# EAGLE board untitled (EAGLE 7.2.0)
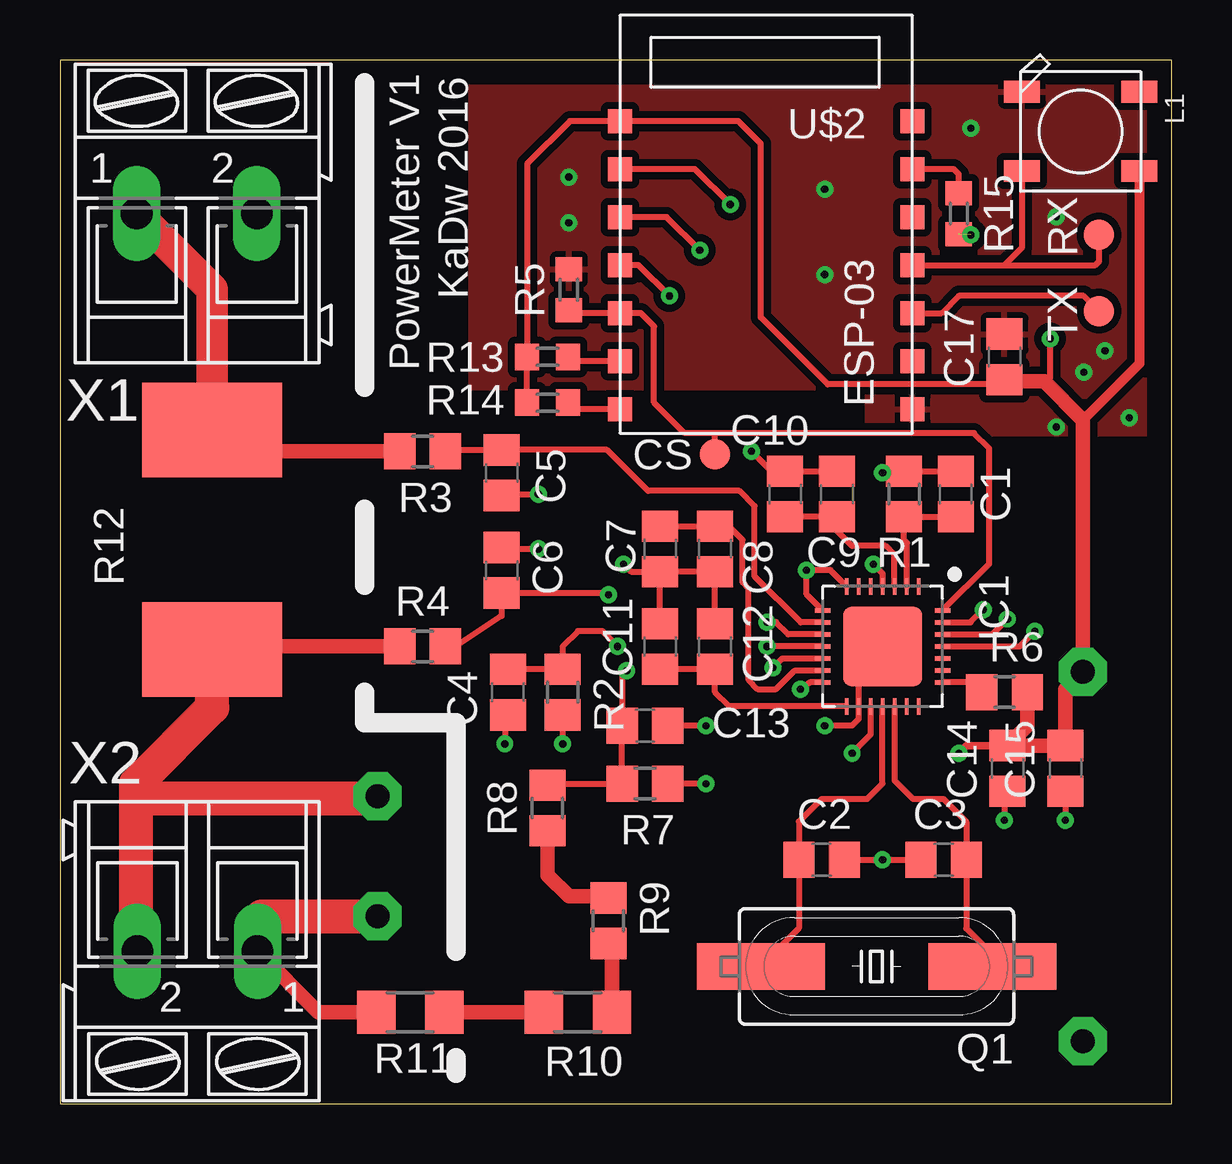
[diagram p0: board, top side]
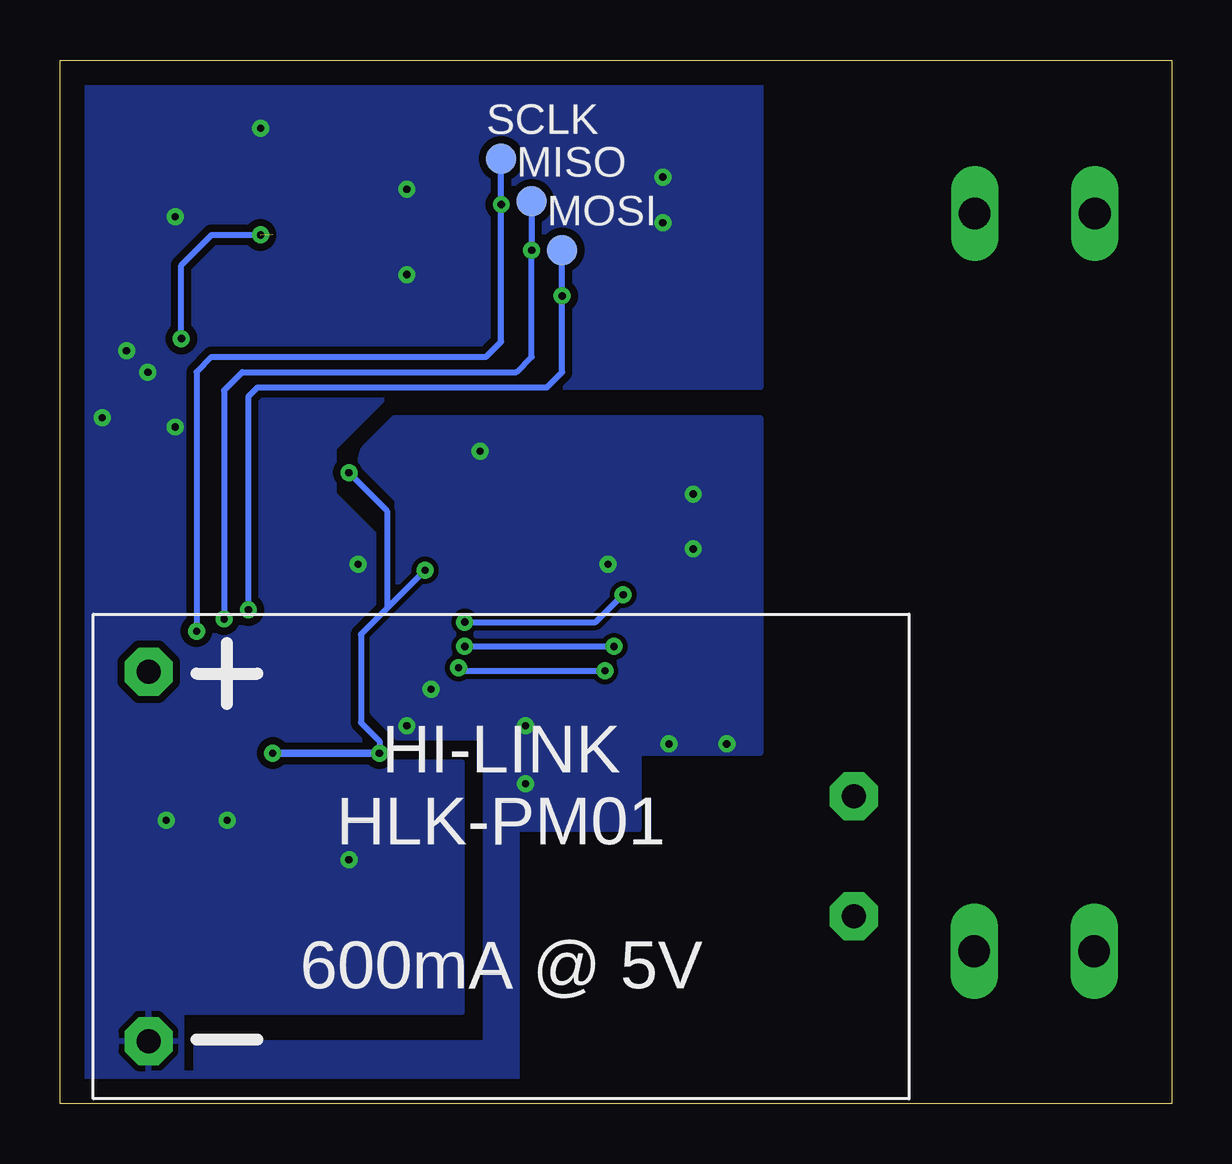
[diagram p1: board, bottom side, seen from below]

Size 46.33 x 43.48 mm. Coordinates in mm from the lower left corner, seen from the top.
Outline: 0,0 46.33,0 46.33,43.48 0,43.48 0,0
Copper layers (1*16): Top 0.035mm / dielectric 1.5mm / Bottom 0.035mm
Design rules "default": minimum track width 10mil, minimum drill 24mil, track to track 8mil, track to pad 8mil, pad to pad 8mil, via to via 8mil, smd to smd 8mil, copper to edge 40mil, drill to drill 8mil, minimum pad ring 10mil, minimum via ring 8mil, stop-mask expansion 4mil, vias tented up to drill 0mil, thermal gap 10mil

## Footprints (pad centres in the part's own frame; a part is rotated, then mirrored left to right if it is on the bottom)
C0805 = smd 1.3 x 1.5: 1 -0.95,0; 2 0.95,0
B1,27 = smd 1.27 x 1.27: TP 0,0
QFN28-ML = smd 0.7 x 0.2: 1 -2.5,1.5; 2 -2.5,1; 3 -2.5,0.5; 4 -2.5,0; 5 -2.5,-0.5; 6 -2.5,-1; 7 -2.5,-1.5; 15 2.5,-1.5; 16 2.5,-1; 17 2.5,-0.5; 18 2.5,0; 19 2.5,0.5; 20 2.5,1; 21 2.5,1.5 | smd 0.2 x 0.7: 8 -1.5,-2.5; 9 -1,-2.5; 10 -0.5,-2.5; 11 0,-2.5; 12 0.5,-2.5; 13 1,-2.5; 14 1.5,-2.5; 22 1.5,2.5; 23 1,2.5; 24 0.5,2.5; 25 0,2.5; 26 -0.5,2.5; 27 -1,2.5; 28 -1.5,2.5 | smd 3.3 x 3.3: EXP 0,0
WS2812B = smd 1.5 x 0.9: 1-VDD 2.45,-1.65; 2-DOUT 2.45,1.65; 3-GND -2.45,1.65; 4-DIN -2.45,-1.65
HC49UP = smd 5.334 x 1.93: 1 -4.826,0; 2 4.826,0
R0805 = smd 1.3 x 1.5: 1 -0.95,0; 2 0.95,0
R0603 = smd 1 x 1.1: 1 -0.85,0; 2 0.85,0
R1206 = smd 1.6 x 1.803: 1 -1.422,0; 2 1.422,0
WRS-2_4527 = smd 3.94 x 5.84: 1 -4.575,0; 2 4.575,0
HLK-PM01 = drill 1 pad 2 octagon: AC_L -14.7,2.5; AC_N -14.7,-2.5; VO+ 14.7,-7.7; VO- 14.7,7.7
ESP-03 = smd 1 x 1: 1 6.2,-7; 2 6.2,-5; 3 6.2,-3; 4 6.2,-1; 5 6.2,1; 6 6.2,3; 7 6.2,5; 8 -6,5; 9 -6,3; 10 -6,1; 11 -6,-1; 12 -6,-3; 13 -6,-5; 14 -6,-7
AK300/2 = drill 1.321 long: 1 -2.515,0; 2 2.489,0

## Placement (x,y rotation side)
C1  1u  [C0805]  37.34,25.4 270 top
C2  20p  [C0805]  31.75,10.16 180 top
C3  20p  [C0805]  36.83,10.16 0 top
C4  33n  [C0805]  18.67,17.14 90 top
C5  33n  [C0805]  18.41,26.29 270 top
C6  33n  [C0805]  18.41,22.22 270 top
C7  4u7  [C0805]  25.02,23.11 90 top
C8  100n  [C0805]  27.3,23.11 90 top
C9  4u7  [C0805]  32.38,25.4 270 top
C10  100n  [C0805]  30.23,25.4 270 top
C11  4u7  [C0805]  25.02,19.05 270 top
C12  100n  [C0805]  27.3,19.05 270 top
C13  33n  [C0805]  24.38,15.75 0 top
C14  100n  [C0805]  39.5,13.97 90 top
C15  10uf  [C0805]  41.91,13.97 90 top
C17  100n  [C0805]  39.37,31.11 90 top
CS  PTR1B1,27  [B1,27]  27.3,27.05 0 top
IC1  ADE7953  [QFN28-ML]  34.29,19.05 270 top
L1  WS2812B  [WS2812B]  42.54,40.51 0 top
MISO  PTR1B1,27  [B1,27]  26.67,37.59 0 bottom
MOSI  PTR1B1,27  [B1,27]  25.4,35.56 0 bottom
Q1  [HC49UP]  34.04,5.71 180 top
R1  10k  [R0805]  35.18,25.4 90 top
R2  1k  [R0805]  20.96,17.14 270 top
R3  1k  [R0805]  15.11,27.18 0 top
R4  1k  [R0805]  15.11,19.05 0 top
R5  [R0603]  21.21,33.91 270 top
R6  10k  [R0805]  39.37,17.14 0 top
R7  1k  [R0805]  24.38,13.33 180 top
R8  [R0805]  20.32,12.32 270 top
R9  [R0805]  22.86,7.62 270 top
R10  [R1206]  21.59,3.81 0 top
R11  [R1206]  14.61,3.81 0 top
R12  0.001R  [WRS-2_4527]  6.35,23.5 90 top
R13  [R0603]  20.32,31.11 180 top
R14  [R0603]  20.32,29.21 180 top
R15  [R0603]  37.46,37.08 270 top
RX  PTR1B1,27  [B1,27]  43.31,36.19 0 top
SCLK  PTR1B1,27  [B1,27]  27.94,39.37 0 bottom
TX  PTR1B1,27  [B1,27]  43.31,33.02 0 top
U$1  MAINS_CONVERTERS  [HLK-PM01]  27.94,10.3 180 bottom
U$2  ESP8266_ESP-03  [ESP-03]  29.34,35.94 0 top
X1  [AK300/2]  5.71,37.08 0 top
X2  [AK300/2]  5.71,6.35 180 top

## Library data of the parts
C1-C15 C17 R1-R11 R13-R15 = rcl
CS MISO MOSI RX SCLK TX = testpad
IC1 = ADE7953
L1 = adafruit
Q1 = adafruit; OC_FARNELL: unknown; OC_NEWARK: unknown
R12 = WSR-2_SHUNT
U$1 = _HLK
U$2 = ESP8266
X1 X2 = con-ptr500; OC_FARNELL: unknown; OC_NEWARK: unknown

## Nets
CLKIN: C2.2 IC1.18 Q1.2
CLKOUT: C3.2 IC1.19 Q1.1
CS: CS.TP IC1.28 R5.2 U$2.12
GND: C2.1 C3.1 C14.1 C15.1 C17.2 IC1.4 L1.3-GND R5.1 U$1.VO- U$2.1
GNDA: C4.1 C5.2 C6.1 C7.1 C8.1 C9.1 C10.1 C11.1 C12.1 C13.2 IC1.14 IC1.16 IC1.EXP R2.2 R7.1
GPIO0: R14.1 U$2.14
GPIO2: R13.1 U$2.13
HOT: R11.1 U$1.AC_L X2.1
IBN: C6.2 IC1.10 R4.2
IBP: C5.1 IC1.9 R3.2
IRQ: IC1.22 R6.1
MISO: IC1.26 MISO.TP U$2.10
MOSI: IC1.27 MOSI.TP U$2.11
N$1: R9.2 R10.2
N$2: R10.1 R11.2
N$3: R15.1 U$2.6
N$12: R8.2 R9.1
NRESET: C1.2 IC1.2 R1.1
REF: C7.2 C8.2 IC1.13
RX1: L1.4-DIN RX.TP U$2.4
SCLK: IC1.25 SCLK.TP U$2.9
SHUNT_HIGH: R3.1 R12.2 X1.1
SHUNT_LOW: R4.1 R12.1 U$1.AC_N X2.2
TX1: TX.TP U$2.3
VCC: C1.1 C14.2 C15.2 C17.1 IC1.7 IC1.8 IC1.17 L1.1-VDD R1.2 R6.2 R13.2 R14.2 R15.2 U$1.VO+ U$2.8
VINTA: C11.2 C12.2 IC1.15
VINTD: C9.2 C10.2 IC1.3
VN: C4.2 IC1.11 R2.1
VP: C13.1 IC1.12 R7.2 R8.1

## Tracks (layer width: path | path; a pad name or v marks a point on that pad's centre or on a via)
CLKIN
  Top 0.254: IC1.18 34.29,13.33 33.66,12.7 31.75,12.7 30.8,11.75 C2.2 30.8,7.3 Q1.2
CLKOUT
  Top 0.254: IC1.19 34.79,13.47 35.56,12.7 36.83,12.7 37.78,11.75 C3.2 37.78,7.3 39.37,5.71 Q1.1 38.1,5.71
CS
  Top 0.254: R5.2 21.25,32.94 U$2.12 24.21,32.94 24.77,32.39 24.77,29.21 26.04,27.94 27.3,27.94 | IC1.28 38.73,22.5 38.73,27.3 38.1,27.94 27.3,27.94 | CS.TP 27.3,27.94
GND  (via drill 0.3)
  Top 0.254: C2.1 v34.29,10.16 C3.1 | C14.1 39.37,12.89 v39.37,11.81 | C15.1 v41.91,11.81 | v33.91,22.48 34.29,22.1 IC1.4
  other vias: 21.21,36.7 21.21,38.61 31.88,38.1 31.88,34.54 41.53,28.19 44.58,28.58 42.67,30.48 43.56,31.37 41.53,36.96 37.97,40.64
  pour Bottom (isolate 0.305): 17.14,44.45 17.14,29.84 32.38,29.84 34.92,27.3 34.92,25.4 33.27,23.75 33.27,20.7 34.29,19.69 34.29,15.88 32.64,14.22 29.59,14.22 29.59,3.81 41.27,3.81 41.27,-1.27 47.62,-1.27 47.62,44.45
  pour Top (isolate 0.305): 17.14,43.81 17.14,29.84 33.66,29.84 33.66,27.94 48.26,27.94 48.26,43.81
GNDA  (via drill 0.3)
  Top 0.254: v26.92,15.75 C13.2 | v26.92,13.33 R7.1 | R2.2 v20.96,14.99 | C4.1 18.54,16.07 v18.54,14.99 | C6.1 18.48,23.11 v19.94,23.11 | C5.2 18.48,25.4 v19.94,25.4 | v23.5,22.48 23.81,22.16 C7.1 | C11.1 C7.1 | C12.1 C8.1 C7.1 | C9.1 C10.1 30.16,26.29 29.72,26.29 v28.83,27.18 | 31.79,15.83 v31.88,15.75 33.02,15.75 33.29,16.02 IC1.16 33.29,18.05 IC1.EXP | IC1.14 31.27,17.55 v30.86,17.27
  pour Bottom: 17.14,28.58 17.14,14.61 22.23,14.61 22.23,11.43 27.3,11.43 27.3,-1.27 40.64,-1.27 40.64,1.02 42.67,1.02 42.67,1.27 40.64,1.27 40.64,2.54 28.57,2.54 28.57,15.24 32.26,15.24 33.27,16.26 33.27,19.56 32.26,20.57 32.26,25.15 33.78,26.67 33.78,26.92 33.66,27.3 32.38,28.58
GPIO0
  Top 0.254: U$2.14 21.44,28.94 R14.1
GPIO2
  Top 0.254: U$2.13 21.34,30.94 R13.1
HOT
  Top 0.61: X2.1 10.77,3.81 R11.1
  Top 1.422: X2.1 8.41,7.8 U$1.AC_L
IBN  (via drill 0.3)
  Top 0.254: R4.2 16.51,19.05 18.41,20.32 C6.2 22.79,21.28 v22.86,21.21 | IC1.10 30.36,19.55 29.85,20.07 v29.46,20.07
  Bottom 0.254: v29.46,20.07 24,20.07 v22.86,21.21
IBP
  Top 0.254: IC1.9 30.88,20.05 28.96,21.97 28.96,24.89 28.32,25.53 24.51,25.53 22.8,27.24 C5.1 16.12,27.24 R3.2
IRQ
  Top 0.254: R6.1 38.02,17.55 IC1.22
MISO  (via drill 0.3)
  Top 0.254: IC1.26 36.8,19.56 38.86,19.56 v39.5,20.19 | v26.67,35.56 25.29,36.94 U$2.10
  Bottom 0.254: MISO.TP v26.67,35.56 26.67,31.11 27.3,30.48 38.73,30.48 39.5,29.72 v39.5,20.19
MOSI  (via drill 0.3)
  Top 0.254: IC1.27 37.96,20.05 v38.48,20.57 | v25.4,33.66 24.11,34.94 U$2.11
  Bottom 0.254: MOSI.TP v25.4,33.66 25.4,30.48 26.04,29.84 38.1,29.84 38.48,29.46 v38.48,20.57
N$1
  Top 0.61: R10.2 23.01,6.52 R9.2
N$2
  Top 0.61: R11.2 R10.1
N$3
  Top 0.254: R15.1 37.46,38.73 37.26,38.94 U$2.6
N$12
  Top 0.61: 20.26,11.17 R8.2 20.32,9.53 21.21,8.64 22.79,8.64 R9.1
NRESET
  Top 0.254: IC1.2 35.31,21.57 35.31,23.37 35.18,23.5 R1.1 C1.2
REF
  Top 0.254: IC1.13 30.61,18.03 29.85,17.27 29.08,17.27 28.7,17.65 28.7,21.46 28.45,21.72 28.45,23.5 27.88,24.06 C8.2 C7.2
RX1
  Top 0.254: U$2.4 39.37,34.94 | 39.37,34.94 43.16,34.94 43.31,35.08 RX.TP | L1.4-DIN 40.09,35.67 39.37,34.94
SCLK  (via drill 0.3)
  Top 0.254: IC1.25 40,19.05 v40.64,19.69 | v27.94,37.47 26.46,38.94 U$2.9
  Bottom 0.254: SCLK.TP v27.94,37.47 27.94,31.75 28.57,31.11 40,31.11 40.64,30.48 v40.64,19.69
SHUNT_HIGH
  Top 0.61: R12.2 7.24,27.18 R3.1
  Top 1.321: X1.1 6.35,33.93 R12.2
SHUNT_LOW
  Top 0.61: R12.1 6.48,19.05 R4.1
  Top 1.422: X2.2 3.17,7.62 3.17,12.7 | 3.17,12.7 3.17,13.33 6.35,16.51 R12.1 6.35,19.69 | U$1.AC_N 13.14,12.7 3.17,12.7
TX1
  Top 0.254: U$2.3 36.75,32.94 37.46,33.66 42.67,33.66 TX.TP
VCC  (via drill 0.3)  (1 unrouted)
  Top 0.254: R14.2 R13.2 19.47,39.16 21.26,40.94 U$2.8 28.27,40.94 29.21,40 29.21,32.77 32,29.97 39.18,29.97 39.43,30.23 41.27,30.23 v41.27,31.88 | IC1.8 31.12,21.22 v31.12,22.22 32.12,22.22 IC1.7 | IC1.17 33.79,15.38 v33.02,14.61 | 37.46,26.48 C1.1 R1.2 35.12,26.29 v34.29,26.29
  Top 0.305: C14.2 37.78,14.92 v37.46,14.61 | v33.02,14.61 v33.02,14.6
  Top 0.406: L1.1-VDD 44.99,30.83 42.64,28.48
  Top 0.61: 39.43,30.23 C17.1 39.44,30.1 41.02,30.1 42.64,28.48 U$1.VO+ 41.91,17.27 C15.2 C14.2 40.32,15.74 R6.2
  Bottom 0.254: v31.12,22.22 32.7,20.64 | 32.7,20.64 33.79,19.55 33.79,15.88 33.02,15.11 v33.02,14.61 | v34.29,26.29 32.7,24.7 32.7,20.64 | v41.27,31.88 41.27,34.92 40,36.19 v37.97,36.19
  Bottom 0.305: v37.46,14.61 v33.02,14.61
VINTA
  Top 0.254: IC1.15 27.9,16.55 27.3,17.14 C12.2 C11.2
VINTD
  Top 0.254: C9.2 31.81,24.45 | 31.81,24.45 C10.2 | IC1.3 34.79,22.87 34.42,23.24 33.02,23.24 31.81,24.45
VN  (via drill 0.3)
  Top 0.254: C4.2 R2.1 20.96,19.05 21.59,19.69 22.61,19.69 v23.24,19.05 | IC1.11 v29.46,19.05
  Bottom 0.254: v29.46,19.05 v23.24,19.05
VP  (via drill 0.3)
  Top 0.254: C13.1 R7.2 20.39,13.33 R8.1 | C13.1 23.5,15.81 | IC1.12 30.1,18.54 v29.72,18.16 | v23.62,18.03 23.43,17.85 C13.1
  Bottom 0.254: v29.72,18.16 29.59,18.03 v23.62,18.03

## Text on the board
tNames: PowerMeter V1 | KaDw 2016